# EAGLE board PCB (EAGLE 9.7.0)
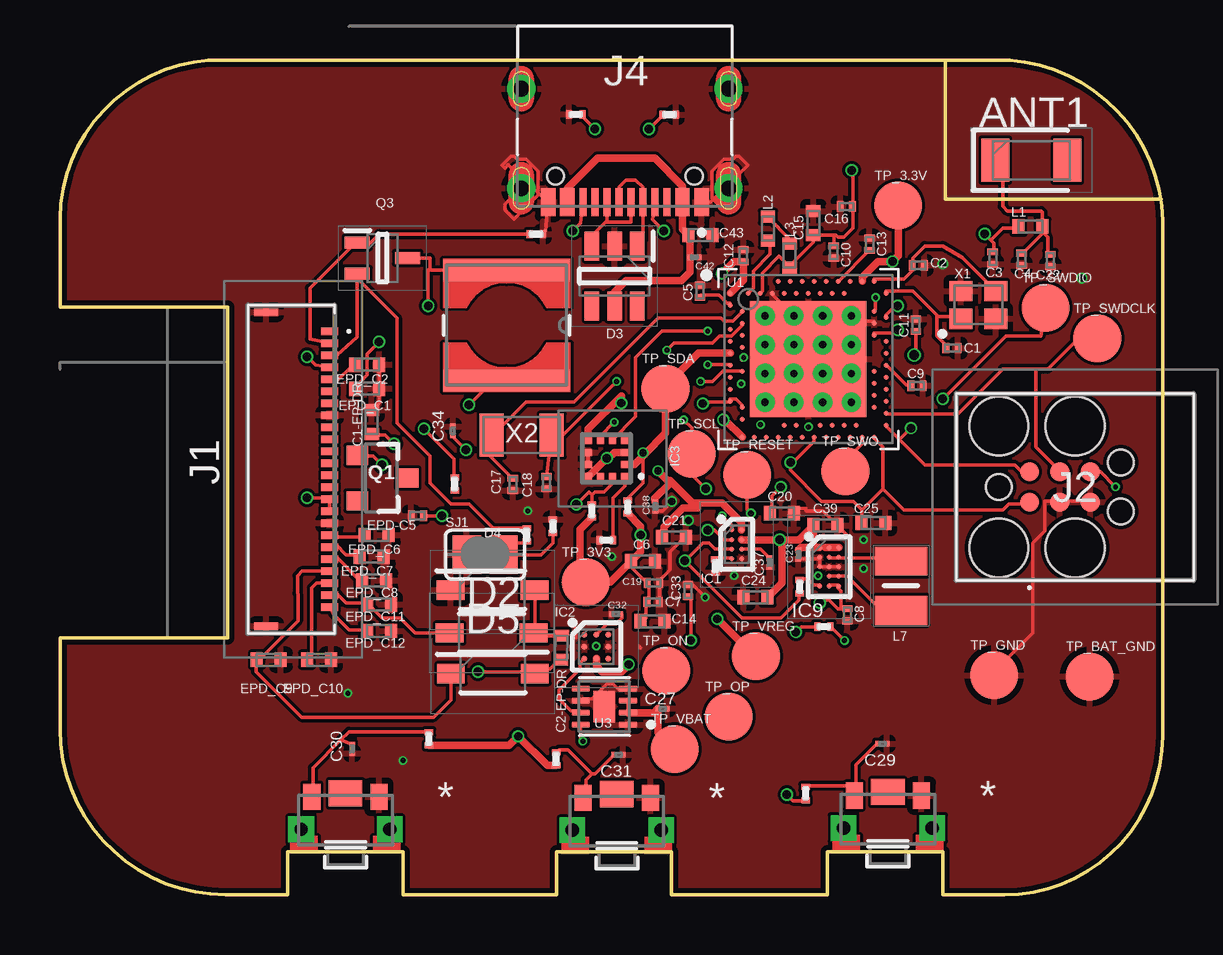
[diagram p0: board, top side]
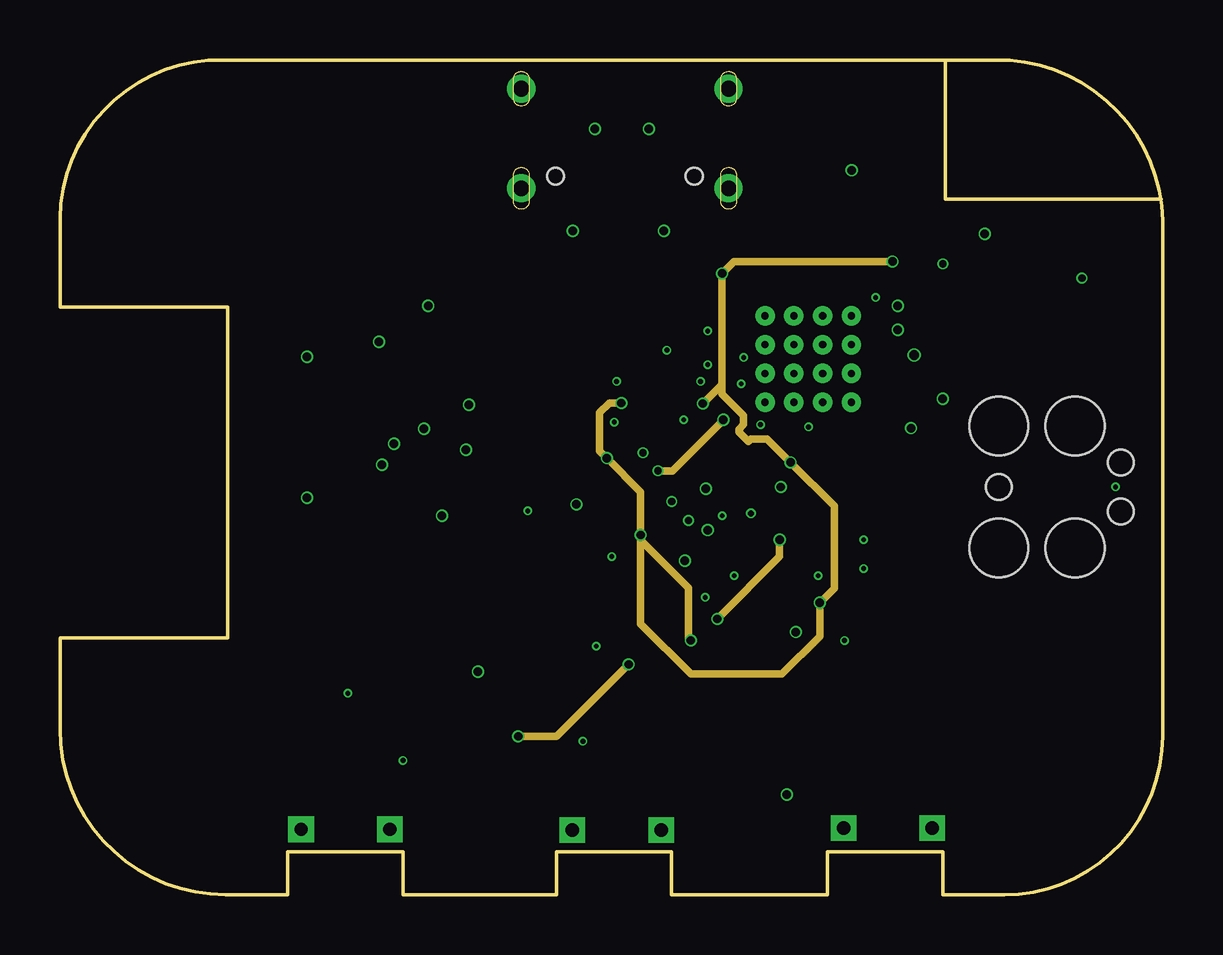
[diagram p1: board, inner layer Route15]
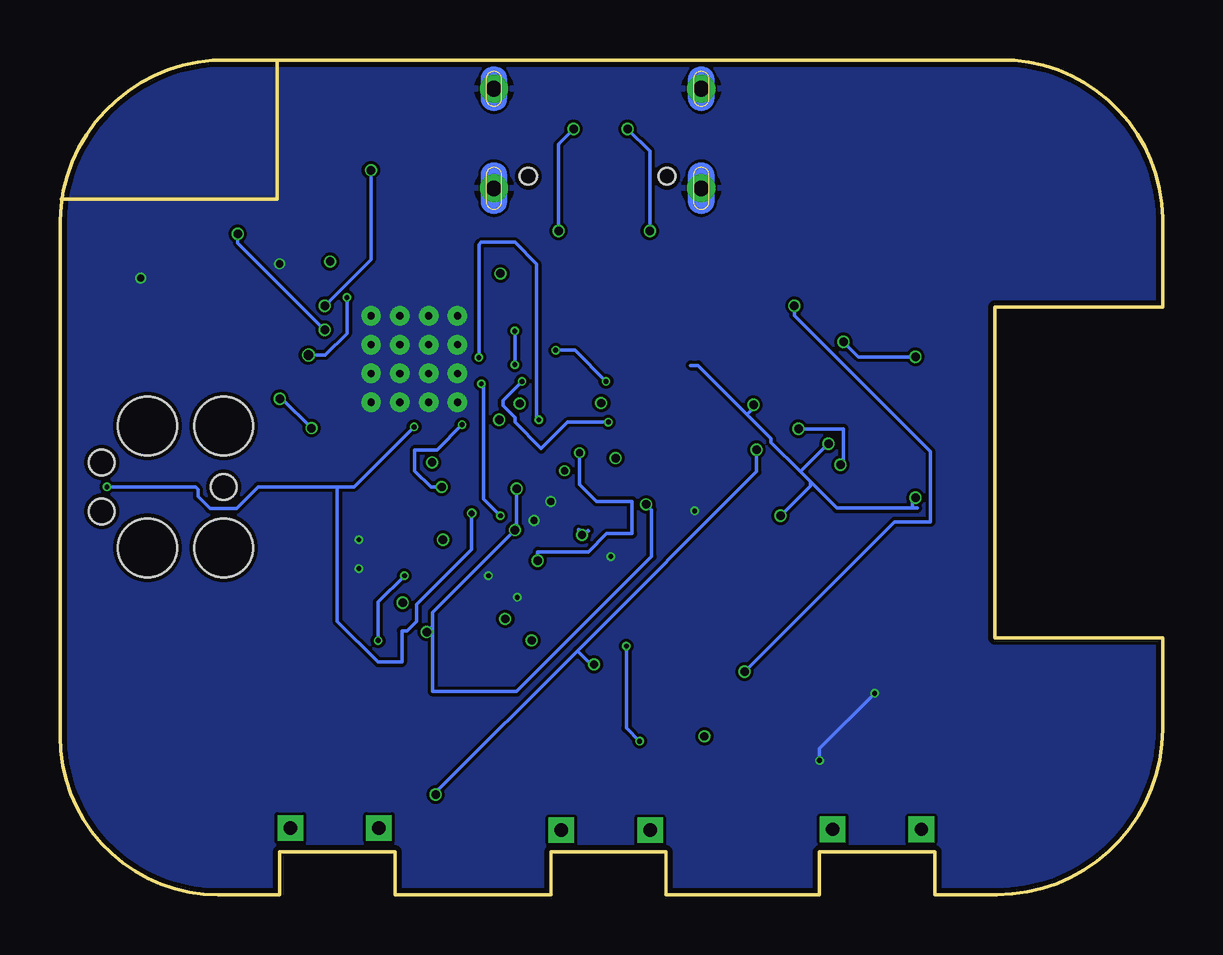
[diagram p2: board, bottom side, seen from below]

Size 45.96 x 34.8 mm. Coordinates in mm from the lower left corner, seen from the top.
Outline: 0,10.7 0,6.9 arc90 6.9,0 9.5,0 9.5,1.8 14.3,1.8 14.3,0 20.7,0 20.7,1.8 25.5,1.8 25.5,0 32,0 32,1.8 36.8,1.8 36.8,0 39.36,0 arc90 45.96,6.6 45.96,28.1 arc90 38.96,34.8 6.8,34.8 arc90 0,28.2 0,24.5 7,24.5 7,10.7 0,10.7
Copper layers (1+2*15+16): Top 0.035mm / dielectric 1.6mm / Route2 0.035mm / dielectric 0.15mm / Route15 0.035mm / dielectric 0.2mm / Bottom 0.035mm
Design rules "jlcpcb-2layers.dru *": minimum track width 5mil, minimum drill 0.3mm, track to track 5mil, track to pad 5mil, pad to pad 5mil, via to via 5mil, smd to smd 5mil, copper to edge 0.2mm, drill to drill 6mil, minimum pad ring 10mil, minimum via ring 3mil, stop-mask expansion 4mil, vias tented up to drill 0mil, thermal gap 10mil
Milling: 2 lines

## Footprints (pad centres in the part's own frame; a part is rotated, then mirrored left to right if it is on the bottom)
2450AT18B100E_ANTC3216X140N = smd 1.15 x 1.8: 1 -1.5,0; 2 1.5,0
NORDIC_NRF_3_RESC0201_L = smd 0.28 x 0.43: 1 -0.255,0; 2 0.255,0
NORDIC_NRF_3_RESC0402_L = smd 0.5 x 0.6: 1 -0.5,0; 2 0.5,0
GRM011R60J152KE01L_2_CAPC0201X13N = smd 0.22 x 0.23: 1 -0.185,0; 2 0.185,0
ESP32_C6_LIBRARY_5_SOD3716X135N = smd 1.15 x 0.8: 1 -1.75,0; 2 1.75,0
ESP32_C6_LIBRARY_3_SOT95P280X145-6N = smd 1.2 x 0.6: 1 -1.25,0.95; 2 -1.25,0; 3 -1.25,-0.95; 4 1.25,-0.95; 5 1.25,0; 6 1.25,0.95
BQ25180YBGR_BGA8C40P2X4_100X155X50 = smd 0.2 x 0.2: A1 -0.2,0.6; A2 0.2,0.6; B1 -0.2,0.2; B2 0.2,0.2; C1 -0.2,-0.2; C2 0.2,-0.2; D1 -0.2,-0.6; D2 0.2,-0.6
DRV2605YZFR_BGA9C50P3X3_144X144X62 = smd 0.25 x 0.25: A1 -0.5,0.5; A2 0,0.5; A3 0.5,0.5; B1 -0.5,0; B2 0,0; B3 0.5,0; C1 -0.5,-0.5; C2 0,-0.5; C3 0.5,-0.5
BMA423_BMA423 = smd 0.3 x 0.35: 1 -0.75,-0.775; 2 -0.25,-0.775; 3 0.25,-0.775; 4 0.75,-0.775; 7 0.75,0.775; 8 0.25,0.775; 9 -0.25,0.775; 10 -0.75,0.775 | smd 0.35 x 0.3: 5 0.775,-0.25; 6 0.775,0.25; 11 -0.775,0.25; 12 -0.775,-0.25
RT6160AWSC_BGA15C40P3X5_140X230X60 = smd 0.216 x 0.216: A1 -0.4,0.8; A2 0,0.8; A3 0.4,0.8; B1 -0.4,0.4; B2 0,0.4; B3 0.4,0.4; C1 -0.4,0; C2 0,0; C3 0.4,0; D1 -0.4,-0.4; D2 0,-0.4; D3 0.4,-0.4; E1 -0.4,-0.8; E2 0,-0.8; E3 0.4,-0.8
503480-2400_5034802400 = smd 0.3 x 0.7: 1 -5.75,1.525; 2 -5.25,1.525; 3 -4.75,1.525; 4 -4.25,1.525; 5 -3.75,1.525; 6 -3.25,1.525; 7 -2.75,1.525; 8 -2.25,1.525; 9 -1.75,1.525; 10 -1.25,1.525; 11 -0.75,1.525; 12 -0.25,1.525; 13 0.25,1.525; 14 0.75,1.525; 15 1.25,1.525; 16 1.75,1.525; 17 2.25,1.525; 18 2.75,1.525; 19 3.25,1.525; 20 3.75,1.525; 21 4.25,1.525; 22 4.75,1.525; 23 5.25,1.525; 24 5.75,1.525 | smd 0.3 x 1: MP1 -6.54,-1.125; MP2 6.54,-1.125
TC2030-IDC_TC2030IDC = smd 0.783 x 0.783: 1 -0.953,-0.635; 2 -0.953,0.635; 3 0.317,-0.635; 4 0.317,0.635; 5 1.588,-0.635; 6 1.588,0.635 | hole 2.451: -2.223,-2.54; -2.223,2.54; 0.952,-2.54; 0.952,2.54 | hole 1.067: -2.223,0; 2.857,-1.016; 2.857,1.016
KH-TYPE-C-16P_KINGHELM_KH-TYPE-C-16P = smd 0.6 x 1.15: A1_B12 -3.2,4.725; A4_B9 -2.4,4.725; A9_B4 2.4,4.725; A12_B1 3.2,4.725 | smd 0.3 x 1.15: A5 -1.25,4.725; A6 -0.25,4.725; A7 0.25,4.725; A8 1.25,4.725; B5 1.75,4.725; B6 0.75,4.725; B7 -0.75,4.725; B8 -1.75,4.725 | drill 0.65 pad 1.05: SH1 -4.32,0; SH2 4.32,0; SH3 -4.32,4.15; SH4 4.32,4.15 | hole 0.7: -2.89,3.65; 2.89,3.65
NORDIC_NRF_2_RESC0402_L = smd 0.5 x 0.6: 1 -0.5,0; 2 0.5,0
ESP32_C6_LIBRARY_2_IND_4828-WE-TPC_WRE = smd 0.9 x 5.3: 1 -2.286,0; 2 2.286,0
MLP2016SR47MT0S1_INDC2016X100N = smd 1.2 x 2.2: 1 -1.028,0; 2 1.028,0
ESP32_C6_LIBRARY_4_ESP32_C6_LIBRARY_4_ESP32_C6_LIBRARY_4_ESP32_C6_LIBRARY_4_ESP32_WROVER_SPARKFUN-DISCRETESEMI_SOT23-3 = smd 0.8 x 0.9: 1 -0.95,-1; 2 0.95,-1; 3 0,1.1
ESP32_C6_LIBRARY_6_SOT65P210X110-3N = smd 1.05 x 0.5: 1 -1.05,0.65; 2 -1.05,-0.65; 3 1.05,0
ERA-1AEB3401C_0201 = smd 0.35 x 0.25: 1 0,0.275; 2 0,-0.275
CPF0201D7K68C1_0201 = smd 0.35 x 0.25: 1 0,0.275; 2 0,-0.275
ESP32_C6_LIBRARY_7_JUMPER_SJ = smd 1.168 x 1.6: 1 -0.762,0; 2 0.762,0
2025-10-22_07-23-44_LIBRARY_SW_EVP-AKE31A_PAN = smd 0.711 x 1.092: 1 -1.4,-0.972; 2 1.4,-0.972 | drill 0.559 pad 0.914 square: 3 -1.848,0.381; 4 1.848,0.381 | smd 1.397 x 1.092: 5 0,-1.124
HECTOR_WATCH_1_TP20R = smd 2 x 2: TP 0,0
NORDIC_NRF_4_AQFN50P700X700X85_HS-74N = smd 4.85 x 4.85: P$74 0,0 | drill 0.3 pad 0.6: P$75 -1.8,1.8; P$76 -0.6,1.8; P$77 0.6,1.8; P$78 1.8,1.8; P$79 -1.8,0.6; P$80 -0.6,0.6; P$81 0.6,0.6; P$82 1.8,0.6; P$83 -1.8,-0.6; P$84 -0.6,-0.6; P$85 0.6,-0.6; P$86 1.8,-0.6; P$87 -1.8,-1.8; P$88 -0.6,-1.8; P$89 0.6,-1.8; P$90 1.8,-1.8 | smd 0.2 x 0.2: P$A8 -1.25,3.25; P$A10 -0.75,3.25; P$A12 -0.25,3.25; P$A14 0.25,3.25; P$A16 0.75,3.25; P$A18 1.25,3.25; P$A20 1.75,3.25; P$A22 2.25,3.25; P$A23 2.75,3.25; P$AA24 3.25,-2.25; P$AB2 -2.75,-2.5; P$AC5 -2,-2.75; P$AC9 -1,-2.75; P$AC11 -0.5,-2.75; P$AC13 0,-2.75; P$AC15 0.5,-2.75; P$AC17 1,-2.75; P$AC19 1.5,-2.75; P$AC21 2,-2.75; P$AC24 3.25,-2.75; P$AD2 -2.75,-3.25; P$AD4 -2.25,-3.25; P$AD6 -1.75,-3.25; P$AD8 -1.25,-3.25; P$AD10 -0.75,-3.25; P$AD12 -0.25,-3.25; P$AD14 0.25,-3.25; P$AD16 0.75,-3.25; P$AD18 1.25,-3.25; P$AD20 1.75,-3.25; P$AD22 2.25,-3.25; P$AD23 2.75,-3.25; P$B1 -3.25,2.75; P$B3 -2.5,2.75; P$B5 -2,2.75; P$B7 -1.5,2.75; P$B9 -1,2.75; P$B11 -0.5,2.75; P$B13 0,2.75; P$B15 0.5,2.75; P$B17 1,2.75; P$B19 1.5,2.75; P$B24 3.25,2.75; P$C1 -3.25,2.25; P$D2 -2.75,2; P$D23 2.75,2; P$E24 3.25,1.75; P$F2 -2.75,1.5; P$F23 2.75,1.5; P$G1 -3.25,1.25; P$H2 -2.75,1; P$H23 2.75,1; P$J1 -3.25,0.75; P$J24 3.25,0.75; P$K2 -2.75,0.5; P$L1 -3.25,0.25; P$L24 3.25,0.25; P$M2 -2.75,0; P$N1 -3.25,-0.25; P$N24 3.25,-0.25; P$P2 -2.75,-0.5; P$P23 2.75,-0.5; P$R1 -3.25,-0.75; P$R24 3.25,-0.75; P$T2 -2.75,-1; P$T23 2.75,-1; P$U1 -3.25,-1.25; P$U24 3.25,-1.25; P$V23 2.75,-1.5; P$W1 -3.25,-1.75; P$W24 3.25,-1.75; P$Y2 -2.75,-2; P$Y23 2.75,-2
ESP32_C6_LIBRARY_SON50P200X200X80-9N = smd 0.76 x 0.27: 1 -0.985,0.75; 2 -0.985,0.25; 3 -0.985,-0.25; 4 -0.985,-0.75; 5 0.985,-0.75; 6 0.985,-0.25; 7 0.985,0.25; 8 0.985,0.75 | smd 0.9 x 1.3: 9 0,0
NORDIC_NRF_BT-XTAL_2016_N = smd 0.95 x 0.85: 1 -0.725,-0.575; 2 0.725,-0.575; 3 0.725,0.575; 4 -0.725,0.575
NORDIC_NRF_1_XTAL_3215_N = smd 1 x 1.8: 1 -1.25,0; 2 1.25,0

## Placement (x,y rotation side)
ANT1  2450AT18B100E  [2450AT18B100E_ANTC3216X140N]  40.49,30.62 0 top
C1  12pF  [NORDIC_NRF_3_RESC0201_L]  37.18,22.79 0 top
C1-EP-DR  10uF  [NORDIC_NRF_3_RESC0402_L]  13,19.7 90 top
C2  12pF  [NORDIC_NRF_3_RESC0201_L]  35.78,26.24 0 top
C2-EP-DR  4.7uF/25V  [NORDIC_NRF_3_RESC0402_L]  20.9,10.3 269 top
C3  1pF  [NORDIC_NRF_3_RESC0201_L]  38.88,26.54 270 top
C4  1pF  [NORDIC_NRF_3_RESC0201_L]  40.08,26.49 270 top
C5  100nF  [NORDIC_NRF_3_RESC0201_L]  26.68,25.16 90 top
C6  4.7µF  [NORDIC_NRF_3_RESC0402_L]  24.3,13.9 0 top
C7  100nF  [NORDIC_NRF_3_RESC0201_L]  24.72,12.21 0 top
C8  100nF  [NORDIC_NRF_3_RESC0201_L]  32.82,11.67 270 top
C9  820pF  [NORDIC_NRF_3_RESC0201_L]  35.72,21.22 0 top
C10  N.C.  [NORDIC_NRF_3_RESC0201_L]  32.25,26.79 270 top
C11  100pF  [NORDIC_NRF_3_RESC0201_L]  35.68,23.74 90 top
C12  100nF  [NORDIC_NRF_3_RESC0201_L]  28.48,26.64 90 top
C13  N.C.  [NORDIC_NRF_3_RESC0201_L]  33.75,27.12 90 top
C14  4.7uF  [NORDIC_NRF_3_RESC0402_L]  24.7,11.4 0 top
C15  1.0uF  [NORDIC_NRF_3_RESC0402_L]  31.4,28 90 top
C16  47nF  [NORDIC_NRF_3_RESC0201_L]  32.78,28.69 180 top
C17  12pF  [NORDIC_NRF_3_RESC0201_L]  18.88,17.11 90 top
C18  12pF  [NORDIC_NRF_3_RESC0201_L]  20.28,17.18 90 top
C19  22uF  [NORDIC_NRF_3_RESC0201_L]  24.74,13 0 top
C20  4.7µF  [NORDIC_NRF_3_RESC0402_L]  30.1,15.9 0 top
C21  4.7µF  [NORDIC_NRF_3_RESC0402_L]  25.6,14.9 0 top
C22  N.C.  [NORDIC_NRF_3_RESC0201_L]  41.28,26.44 270 top
C23  0.1uF  [GRM011R60J152KE01L_2_CAPC0201X13N]  30.78,14.18 90 top
C24  10uF  [NORDIC_NRF_3_RESC0402_L]  29,12.4 0 top
C25  22uF  [NORDIC_NRF_3_RESC0402_L]  33.9,15.5 0 top
C27  0.1uF  [GRM011R60J152KE01L_2_CAPC0201X13N]  25.12,7.76 180 top
C29  1uF  [GRM011R60J152KE01L_2_CAPC0201X13N]  34.28,6.3 180 top
C30  1uF  [GRM011R60J152KE01L_2_CAPC0201X13N]  12.18,6.08 90 top
C31  1uF  [GRM011R60J152KE01L_2_CAPC0201X13N]  23.28,5.84 180 top
C32  1uF  [GRM011R60J152KE01L_2_CAPC0201X13N]  23.18,11.7 0 top
C33  22uF  [NORDIC_NRF_3_RESC0201_L]  26.18,12.68 90 top
C34  0.1uF  [GRM011R60J152KE01L_2_CAPC0201X13N]  16.38,19.34 270 top
C37  1uF  [GRM011R60J152KE01L_2_CAPC0201X13N]  29.57,13.85 90 top
C38  1uF  [GRM011R60J152KE01L_2_CAPC0201X13N]  24.81,16.19 90 top
C39  10uF  [NORDIC_NRF_3_RESC0402_L]  31.9,15.4 0 top
C42  0.1uF  [GRM011R60J152KE01L_2_CAPC0201X13N]  26.44,26.58 180 top
C43  4.7uF  [NORDIC_NRF_3_RESC0402_L]  26.7,27.5 0 top
D2  MBR0530  [ESP32_C6_LIBRARY_5_SOD3716X135N]  17.99,10.91 180 top
D3  USBLC6-2SC6Y  [ESP32_C6_LIBRARY_3_SOT95P280X145-6N]  23.12,25.79 270 top
D4  MBR0530  [ESP32_C6_LIBRARY_5_SOD3716X135N]  18.03,12.7 0 top
D5  MBR0530  [ESP32_C6_LIBRARY_5_SOD3716X135N]  18.05,9.22 0 top
EPD-C5  0.1uF/50V  [NORDIC_NRF_3_RESC0201_L]  14.9,15.8 0 top
EPD_C1  1uF/50V  [NORDIC_NRF_3_RESC0402_L]  12.8,21.1 180 top
EPD_C2  1uF/50V  [NORDIC_NRF_3_RESC0402_L]  12.8,22.1 180 top
EPD_C6  1uF/50V  [NORDIC_NRF_3_RESC0402_L]  13.2,15 180 top
EPD_C7  1uF/50V  [NORDIC_NRF_3_RESC0402_L]  13,14.1 180 top
EPD_C8  1uF/50V  [NORDIC_NRF_3_RESC0402_L]  13.1,13.1 180 top
EPD_C9  1uF/50V  [NORDIC_NRF_3_RESC0402_L]  8.7,9.8 180 top
EPD_C10  1uF/50V  [NORDIC_NRF_3_RESC0402_L]  10.8,9.8 180 top
EPD_C11  1uF/50V  [NORDIC_NRF_3_RESC0402_L]  13.3,12.1 180 top
EPD_C12  1uF/50V  [NORDIC_NRF_3_RESC0402_L]  13.3,11 180 top
IC1  BQ25180YBGR_BQ25180YBGR  [BQ25180YBGR_BGA8C40P2X4_100X155X50]  28.21,14.61 0 top
IC2  DRV2605YZFR  [DRV2605YZFR_BGA9C50P3X3_144X144X62]  22.36,10.35 0 top
IC3  BMA421  [BMA423_BMA423]  22.78,18.19 90 top
IC9  RT6160AWSC  [RT6160AWSC_BGA15C40P3X5_140X230X60]  32.06,13.67 0 top
J1  503480-2400  [503480-2400_5034802400]  9.72,17.74 270 top
J2  TC2030-IDC  [TC2030-IDC_TC2030IDC]  41.36,17 0 top
J4  KH-TYPE-C-16P  [KH-TYPE-C-16P_KINGHELM_KH-TYPE-C-16P]  23.55,33.6 180 top
L1  3.9nH  [NORDIC_NRF_2_RESC0402_L]  40.45,27.86 0 top
L2  10µH  [NORDIC_NRF_2_RESC0402_L]  29.51,27.76 90 top
L3  15nH  [NORDIC_NRF_2_RESC0402_L]  30.41,26.64 270 top
L5  68uH  [ESP32_C6_LIBRARY_2_IND_4828-WE-TPC_WRE]  18.62,23.74 270 top
L7  FTC252012SR47MBCA  [MLP2016SR47MT0S1_INDC2016X100N]  35.06,12.88 270 top
Q1  20V/4.2A/52mΩ/1.4W  [ESP32_C6_LIBRARY_4_ESP32_C6_LIBRARY_4_ESP32_C6_LIBRARY_4_ESP32_C6_LIBRARY_4_ESP32_WROVER_SPARKFUN-DISCRETESEMI_SOT23-3]  13.39,17.37 270 top
Q3  SI1308EDL-T1-GE3  [ESP32_C6_LIBRARY_6_SOT65P210X110-3N]  13.44,26.54 0 top
R1  10K  [ERA-1AEB3401C_0201]  27.32,13.7 181 top
R1_EP_DR  0.47  [CPF0201D7K68C1_0201]  19.45,15 180 top
R1_USB  5K1  [CPF0201D7K68C1_0201]  25.4,32.52 270 top
R2  0  [CPF0201D7K68C1_0201]  30.84,12.84 180 top
R2_EP_DR  10K  [CPF0201D7K68C1_0201]  19.85,27.54 270 top
R2_USB  5K1  [CPF0201D7K68C1_0201]  21.5,32.53 270 top
R3  0  [CPF0201D7K68C1_0201]  22.77,14.78 90 top
R4  0  [CPF0201D7K68C1_0201]  31.84,11.18 90 top
R5  10K  [CPF0201D7K68C1_0201]  15.38,6.5 0 top
R7  10K  [CPF0201D7K68C1_0201]  31.08,4.22 0 top
R8  10K  [CPF0201D7K68C1_0201]  20.68,5.66 0 top
R17  3K3  [CPF0201D7K68C1_0201]  22.17,16 180 top
R18  3K3  [CPF0201D7K68C1_0201]  23.67,16.16 180 top
R_POWER_EPD  10K  [CPF0201D7K68C1_0201]  16.45,17.12 0 top
R_TYPE_SEL  2.2  [CPF0201D7K68C1_0201]  20.55,15.36 0 top
SJ1  [ESP32_C6_LIBRARY_7_JUMPER_SJ]  17.72,14.18 0 top
SW_DN  2025-10-22_07-23-44_LIBRARY_EVP-AKE31ASW_EVP-AKE31A_PAN  [2025-10-22_07-23-44_LIBRARY_SW_EVP-AKE31A_PAN]  34.51,3.16 180 top
SW_ENT  2025-10-22_07-23-44_LIBRARY_EVP-AKE31ASW_EVP-AKE31A_PAN  [2025-10-22_07-23-44_LIBRARY_SW_EVP-AKE31A_PAN]  23.21,3.07 180 top
SW_UP  2025-10-22_07-23-44_LIBRARY_EVP-AKE31ASW_EVP-AKE31A_PAN  [2025-10-22_07-23-44_LIBRARY_SW_EVP-AKE31A_PAN]  11.9,3.11 180 top
TP_3.3V  HECTOR_WATCH_1_TPTP20R  [HECTOR_WATCH_1_TP20R]  34.94,28.73 0 top
TP_3V3  HECTOR_WATCH_1_TPTP20R  [HECTOR_WATCH_1_TP20R]  21.91,13.03 0 top
TP_BAT_GND  HECTOR_WATCH_1_TPTP20R  [HECTOR_WATCH_1_TP20R]  42.92,9.1 0 top
TP_GND  HECTOR_WATCH_1_TPTP20R  [HECTOR_WATCH_1_TP20R]  38.94,9.15 0 top
TP_ON  HECTOR_WATCH_1_TPTP20R  [HECTOR_WATCH_1_TP20R]  25.28,9.34 0 top
TP_OP  HECTOR_WATCH_1_TPTP20R  [HECTOR_WATCH_1_TP20R]  27.88,7.42 0 top
TP_RESET  HECTOR_WATCH_1_TPTP20R  [HECTOR_WATCH_1_TP20R]  28.64,17.51 0 top
TP_SCL  HECTOR_WATCH_1_TPTP20R  [HECTOR_WATCH_1_TP20R]  26.34,18.38 0 top
TP_SDA  HECTOR_WATCH_1_TPTP20R  [HECTOR_WATCH_1_TP20R]  25.24,21.1 0 top
TP_SWDCLK  HECTOR_WATCH_1_TPTP20R  [HECTOR_WATCH_1_TP20R]  43.24,23.19 0 top
TP_SWDIO  HECTOR_WATCH_1_TPTP20R  [HECTOR_WATCH_1_TP20R]  41.09,24.47 0 top
TP_SWO  HECTOR_WATCH_1_TPTP20R  [HECTOR_WATCH_1_TP20R]  32.74,17.65 0 top
TP_VBAT  HECTOR_WATCH_1_TPTP20R  [HECTOR_WATCH_1_TP20R]  25.62,6.08 0 top
TP_VREG  HECTOR_WATCH_1_TPTP20R  [HECTOR_WATCH_1_TP20R]  29.01,9.94 0 top
U1  NRF52840_QF  [NORDIC_NRF_4_AQFN50P700X700X85_HS-74N]  31.19,22.33 0 top
U3  MAX17048G+T10  [ESP32_C6_LIBRARY_SON50P200X200X80-9N]  22.69,7.84 180 top
X1  32MHz  [NORDIC_NRF_BT-XTAL_2016_N]  38.28,24.59 0 top
X2  32.768kHz  [NORDIC_NRF_1_XTAL_3215_N]  19.25,19.16 0 top

## Library data of the parts
ANT1 = InkTime_v5.lbr; ARROW_PART_NUMBER: 2450AT18B100E; ARROW_PRICE-STOCK: https://www.arrow.com/en/products/2450at18b100e/johanson-dielectrics?utm_currency=USD&region=nac; DESCRIPTION: Antennas 2.45GHz ANTENNA; HEIGHT: 1.4mm; MANUFACTURER_NAME: JOHANSON TECHNOLOGY; MANUFACTURER_PART_NUMBER: 2450AT18B100E; MOUSER_PART_NUMBER: 609-2450AT18B100E; MOUSER_PRICE-STOCK: https://www.mouser.co.uk/ProductDetail/Johanson-Technology/2450AT18B100E?qs=yCnrNFeXz%252Bh5MFsFIXGZGA%3D%3D
C1 C1-EP-DR C2 C2-EP-DR C3-C22 C24 C25 C33 C39 C43 EPD-C5 EPD_C1 EPD_C2 EPD_C6-EPD_C12 L1-L3 R1 R1_EP_DR R1_USB R2 R2_EP_DR R2_USB R3-R5 R7 R8 R17 R18 R_POWER_EPD R_TYPE_SEL SJ1 TP_3.3V TP_3V3 TP_BAT_GND TP_GND TP_ON TP_OP TP_RESET TP_SCL TP_SDA TP_SWDCLK TP_SWDIO TP_SWO TP_VBAT TP_VREG U1 X1 X2 = InkTime_v5.lbr
C23 C27 C29-C32 C34 C37 C38 C42 = InkTime_v5; AVAILABILITY: In Stock; CHECK_PRICES: https://www.snapeda.com/parts/GRM011R60J152KE01L/Murata/view-part/?ref=eda; DESCRIPTION: SMD Capacitor X5R(EIA) with Capacitance: 1500pF Tol. 10%. Rated Voltage: 6.3Vdc; MF: Murata; MP: GRM011R60J152KE01L; PACKAGE: 0201 Murata; PRICE: None; SNAPEDA_LINK: https://www.snapeda.com/parts/GRM011R60J152KE01L/Murata/view-part/?ref=snap
D2 D4 D5 = InkTime_v5.lbr; AVAILABILITY: In Stock; CHECK_PRICES: https://www.snapeda.com/parts/MBR0530/Onsemi/view-part/?ref=eda; DESCRIPTION: Diode Schottky 30 V 500mA Surface Mount SOD-123; MF: ON Semiconductor; MP: MBR0530; PACKAGE: SOD-123-2 ON Semiconductor; PRICE: None; PURCHASE-URL: https://www.snapeda.com/api/url_track_click_mouser/?unipart_id=179458&manufacturer=ON Semiconductor&part_name=MBR0530&search_term=None; SNAPEDA_LINK: https://www.snapeda.com/parts/MBR0530/Onsemi/view-part/?ref=snap
D3 = InkTime_v5.lbr; AVAILABILITY: In Stock; CHECK_PRICES: https://www.snapeda.com/parts/USBLC6-2SC6Y/STMicroelectronics/view-part/?ref=eda; DESCRIPTION: 17V Clamp 5A (8/20µs) Ipp Tvs Diode Surface Mount SOT-23-6; MF: STMicroelectronics; MP: USBLC6-2SC6Y; PACKAGE: SOT-23-6 STMicroelectronics; PRICE: None; SNAPEDA_LINK: https://www.snapeda.com/parts/USBLC6-2SC6Y/STMicroelectronics/view-part/?ref=snap
IC1 = InkTime_v5; ARROW_PART_NUMBER: BQ25180YBGR; ARROW_PRICE-STOCK: https://www.arrow.com/en/products/bq25180ybgr/texas-instruments?utm_currency=USD&region=nac; DESCRIPTION: Charger IC Lithium Ion/Polymer, Lithium Iron Phosphate 8-DSBGA (1.6x1.1); HEIGHT: 0.5mm; MANUFACTURER_NAME: Texas Instruments; MANUFACTURER_PART_NUMBER: BQ25180YBGR; MOUSER_PART_NUMBER: 595-BQ25180YBGR; MOUSER_PRICE-STOCK: https://www.mouser.co.uk/ProductDetail/Texas-Instruments/BQ25180YBGR?qs=doiCPypUmgEWjAK%252BJAX6Tw%3D%3D
IC2 = InkTime_v5.lbr; ARROW_PART_NUMBER: DRV2605YZFR; ARROW_PRICE-STOCK: https://www.arrow.com/en/products/drv2605yzfr/texas-instruments?region=nac; DESCRIPTION: Haptic Driver for ERM/LRA with Built-In Library and Smart Loop Architecture; HEIGHT: 0.625mm; MANUFACTURER_NAME: Texas Instruments; MANUFACTURER_PART_NUMBER: DRV2605YZFR
IC3 = InkTime_v5.lbr; ARROW_PART_NUMBER: BMA423; ARROW_PRICE-STOCK: https://www.arrow.com/en/products/bma423/bosch; DESCRIPTION: Accelerometers Triaxial low-g 12bit Acceleration Sensor; HEIGHT: 1mm; MANUFACTURER_NAME: BOSCH; MANUFACTURER_PART_NUMBER: BMA423; MOUSER_PART_NUMBER: 262-BMA423; MOUSER_PRICE-STOCK: https://www.mouser.co.uk/ProductDetail/Bosch-Sensortec/BMA423?qs=HXFqYaX1Q2xC%252BSgeGoX3mg%3D%3D
IC9 = InkTime_v5; DESCRIPTION: Buck-Boost Regulator Positive Output Step-Up/Step-Down I2C DC-DC Controller IC 15-WL-CSP (BSC) (1.4x2.3); HEIGHT: 0.6mm; MANUFACTURER_NAME: RICHTEK; MANUFACTURER_PART_NUMBER: RT6160AWSC; MOUSER_PART_NUMBER: 835-RT6160AWSC; MOUSER_PRICE-STOCK: https://www.mouser.co.uk/ProductDetail/Richtek/RT6160AWSC?qs=amGC7iS6iy%2FLd9PSoixZXQ%3D%3D
J1 = InkTime_v5.lbr; DESCRIPTION: FFC & FPC Connectors 0.5mm FPC RA SMT Dual Contact 24Ckt; HEIGHT: 1.87mm; MANUFACTURER_NAME: Molex; MANUFACTURER_PART_NUMBER: 503480-2400; MOUSER_PART_NUMBER: 538-503480-2400; MOUSER_PRICE-STOCK: https://www.mouser.co.uk/ProductDetail/Molex/503480-2400?qs=OAhjpuo3Vu7efIoxFh9AOw%3D%3D
J2 = InkTime_v5.lbr; DESCRIPTION: CABLE ADAPTER 6 POS; HEIGHT: 19mm; MANUFACTURER_NAME: Tag Connect; MANUFACTURER_PART_NUMBER: TC2030-IDC
J4 = InkTime_v5.lbr; AVAILABILITY: Not in stock; CHECK_PRICES: https://www.snapeda.com/parts/KH-TYPE-C-16P/Kinghelm/view-part/?ref=eda; MF: kinghelm; MP: KH-TYPE-C-16P; PACKAGE: None; PRICE: None; SNAPEDA_LINK: https://www.snapeda.com/parts/KH-TYPE-C-16P/Kinghelm/view-part/?ref=snap
L5 = InkTime_v5.lbr; COPYRIGHT: Copyright (C) 2024 Ultra Librarian. All rights reserved.; MANUFACTURER_PART_NUMBER: 744043680; MFR_NAME: Wurth Electronics
L7 = InkTime_v5.lbr; DESCRIPTION: SMD / SMT Inductors (Coils), L=0.47?H, L x W x T :; HEIGHT: 1mm; JLCPCB: https://jlcpcb.com/partdetail/6763488-FTC252012SR47MBCA/C5832368; MANUFACTURER_NAME: TDK; MANUFACTURER_PART_NUMBER: FTC252012SR47MBCA
Q1 = InkTime_v5.lbr; PROD_ID: TRAN-14388
Q3 = InkTime_v5.lbr; AVAILABILITY: In Stock; CHECK_PRICES: https://www.snapeda.com/parts/SI1308EDL-T1-GE3/Vishay+Siliconix/view-part/?ref=eda; DESCRIPTION: Si1308EDL-T1-GE3 N-channel MOSFET Transistor, 1.5 A, 30 V, 3-Pin SC-70 | Siliconix / Vishay SI1308EDL-T1-GE3; MF: Vishay Siliconix; MP: SI1308EDL-T1-GE3; PACKAGE: SOT-323 Vishay Semiconductor; PRICE: None; PURCHASE-URL: https://www.snapeda.com/api/url_track_click_mouser/?unipart_id=274603&manufacturer=Vishay Siliconix&part_name=SI1308EDL-T1-GE3&search_term=None; SNAPEDA_LINK: https://www.snapeda.com/parts/SI1308EDL-T1-GE3/Vishay+Siliconix/view-part/?ref=snap
SW_DN SW_ENT SW_UP = InkTime_v5.lbr; COPYRIGHT: Copyright (C) 2025 Ultra Librarian. All rights reserved.; DIGI-KEY_PART_NUMBER_1: P123437TR-ND; DIGI-KEY_PART_NUMBER_2: P123437CT-ND; DIGI-KEY_PART_NUMBER_3: P123437DKR-ND; MANUFACTURER_NAME: Panasonic; MANUFACTURER_PART_NUMBER: EVP-AKE31A
U3 = InkTime_v5.lbr; AVAILABILITY: In Stock; CHECK_PRICES: https://www.snapeda.com/parts/MAX17048G+T10/Analog+Devices/view-part/?ref=eda; DESCRIPTION: 3µA 1-Cell/2-Cell Fuel Gauge with ModelGauge; MF: Analog Devices; MP: MAX17048G+T10; PACKAGE: TDFN-8 Maxim; PRICE: None; PURCHASE-URL: https://www.snapeda.com/api/url_track_click_mouser/?unipart_id=329239&manufacturer=Analog Devices&part_name=MAX17048G+T10&search_term=None; SNAPEDA_LINK: https://www.snapeda.com/parts/MAX17048G+T10/Analog+Devices/view-part/?ref=snap

## Nets
3V3/1.7D: C34.2 IC2.C2 R5.2 R7.2 R8.2
3V3/2.4A: C6.1 C7.1 C8.1 C12.1 C14.1 C19.1 C25.1 C33.1 IC3.3 IC3.7 IC3.10 IC9.E2 IC9.E3 J2.1 R17.1 R18.1 TP_3.3V.TP TP_3V3.TP U1.P$A22 U1.P$AD14 U1.P$AD23 U1.P$B1 U1.P$W1 U1.P$Y2
10K: IC1.D1 R1.2
ALERT/1.6C: U3.5
ALERT/2.5C: U1.P$J24
D+/1.5D: D3.4
D+/2.7D: U1.P$AD6
D-/1.5D: D3.6
D-/2.7D: U1.P$AD4
DN: D3.1 J4.A7 J4.B7
DP: D3.3 J4.A6 J4.B6
EPD_3V3: C1-EP-DR.1 EPD-C5.2 J1.15 J1.16 L5.2
EPD_BUSY/1.5D: J1.9
EPD_BUSY/2.2D: U1.P$AD12
EPD_CS/1.4C: J1.12
EPD_CS/2.2D: U1.P$K2
EPD_DC/1.5D: J1.11
EPD_DC/2.2D: U1.P$AD10
EPD_RST/1.5D: J1.10
EPD_RST/2.2D: U1.P$AC11
GDR: J1.2 Q3.1 R2_EP_DR.2
GND: C1-EP-DR.2 C1.2 C2.2 C3.2 C4.2 C5.2 C6.2 C7.2 C8.2 C9.2 C10.2 C11.2 C12.2 C13.2 C14.2 C15.2 C16.2 C17.1 C18.1 C19.2 C20.2 C21.2 C22.2 C23.1 C24.1 C25.2 C27.1 C29.1 C30.1 C31.1 C32.1 C33.2 C34.1 C37.1 C38.1 C39.2 C42.1 C43.2 D3.2 D4.1 EPD-C5.1 EPD_C1.1 EPD_C2.1 EPD_C6.1 EPD_C7.1 EPD_C8.1 EPD_C9.1 EPD_C10.1 EPD_C11.1 EPD_C12.1 IC1.D2 IC2.B1 IC2.B3 IC3.8 IC3.9 IC9.B1 IC9.C1 IC9.C2 IC9.C3 J1.8 J1.17 J1.MP1 J1.MP2 J2.3 J2.5 J4.A1_B12 J4.A12_B1 J4.SH1 J4.SH2 J4.SH3 J4.SH4 R1.1 R1_USB.1 R2_EP_DR.1 R2_USB.2 R3.1 R_TYPE_SEL.1 SJ1.1 SW_DN.1 SW_ENT.1 SW_UP.1 TP_BAT_GND.TP TP_GND.TP U1.P$74 U1.P$75 U1.P$76 U1.P$77 U1.P$78 U1.P$79 U1.P$80 U1.P$81 U1.P$82 U1.P$83 U1.P$84 U1.P$85 U1.P$86 U1.P$87 U1.P$88 U1.P$89 U1.P$90 U1.P$B7 U1.P$F23 U3.1 U3.4 U3.6 U3.9 X1.2 X1.4
HAPTIC_EN/1.4C: IC2.A1
HAPTIC_EN/2.6A: U1.P$U1
IMU_INT1: IC3.5 U1.P$N1
IMU_INT2: IC3.6 U1.P$P2
LX1: IC9.B2 IC9.B3 L7.1
LX2: IC9.D2 IC9.D3 L7.2
MOSI/1.5D: J1.14
MOSI/2.2D: U1.P$B13
N$1: IC9.D1 R4.2
N$2: IC3.1 R3.2
N$3: C9.1 U1.P$N24
N$4: IC9.E1 R2.2
N$5: C20.1 U1.P$AC5
N$6: C3.1 L1.1 U1.P$H23
N$7: ANT1.1 C4.1 C22.1 L1.2
N$8: C1.1 U1.P$B24 X1.1
N$9: C2.1 U1.P$A23 X1.3
N$10: C13.1 U1.P$A18
N$11: C11.1 U1.P$D23
N$12: C10.1 C15.1 C16.1 L3.2 U1.P$B5 U1.P$E24
N$13: L2.1 U1.P$B3
N$14: L2.2 L3.1
N$15: C5.1 U1.P$C1
N$16: C17.2 U1.P$D2 X2.1
N$17: C2-EP-DR.2 D5.2 L5.1 Q3.3
N$18: C18.2 U1.P$F2 X2.2
N$20: C2-EP-DR.1 D2.1 D4.2
N$22: R1_EP_DR.1 R_TYPE_SEL.2 SJ1.2
N$23: Q1.2
N$24: Q1.3
N$25: Q1.1 R_POWER_EPD.1
N$26: R_POWER_EPD.2
N$27: TP_OP.TP
N$28: TP_ON.TP
N$29: EPD_C1.2 J1.4
N$30: EPD_C2.2 J1.5
N$31: EPD_C6.2 J1.18
N$32: J4.B5 R2_USB.1
N$33: EPD_C7.2 J1.19
N$34: C32.2 IC2.A2
N$35: EPD_C8.2 J1.20
N$36: J4.A5 R1_USB.2
N$38: EPD_C10.2 J1.22
N$40: EPD_C12.2 J1.24
OUT+: IC2.A3
OUT-: IC2.C3
P0.04: U1.P$J1
P0.09: U1.P$L24
P0.13/1.5D: C30.2 R5.1 SW_UP.2
P0.13/2.6C: U1.P$AD8
P0.14/1.5D: C31.2 R8.1 SW_ENT.2
P0.14/2.7C: U1.P$AC9
P0.19: U1.P$AC15
P0.20: U1.P$AD16
P0.21: U1.P$AC17
P0.22: U1.P$AD18
P0.23: U1.P$AC19
P0.24: U1.P$AD20
P0.25: U1.P$AC21
P0.26: U1.P$G1
P0.27: U1.P$H2
P0.28: U1.P$B11
P0.29: U1.P$A10
P0.30: U1.P$B9
P0.31: U1.P$A8
P1.01/2.4B: U1.P$Y23
P1.02/1.6C: C29.2 R7.1 SW_DN.2
P1.02/2.8C: U1.P$W24
P1.03: U1.P$V23
P1.04: U1.P$U24
P1.05: U1.P$T23
P1.06: U1.P$R24
P1.07: U1.P$P23
P1.09: U1.P$R1
P1.10: U1.P$A20
P1.11: U1.P$B19
P1.12: U1.P$B17
P1.13: U1.P$A16
P1.14: U1.P$B15
P1.15: U1.P$A14
PMIC_INT: IC1.A1 U1.P$T2
PREVGH: D5.1 EPD_C9.2 J1.21
PREVGL: D2.2 EPD_C11.2 J1.23
RESE: J1.3 Q3.2 R1_EP_DR.2
RESET: J2.6 TP_RESET.TP U1.P$AC13
SCK/1.5D: J1.13
SCK/2.2D: U1.P$A12
SCL/1.4C: IC2.C1 U3.7
SCL/2.4C: IC1.B1 IC3.12 R4.1 R17.2 TP_SCL.TP U1.P$M2
SDA/1.4C: IC2.B2 U3.8
SDA/2C: IC1.C1 IC3.2 R2.1 R18.2 TP_SDA.TP U1.P$L1
SWDCLK: J2.4 TP_SWDCLK.TP U1.P$AA24
SWDIO: J2.2 TP_SWDIO.TP U1.P$AC24
SWO: TP_SWO.TP U1.P$AD22
VBAT/1.2A: C27.2 TP_VBAT.TP U3.2 U3.3
VBAT/2.5C: C37.2 IC1.C2
VBUS/1.5D: C42.2 C43.1 D3.5 J4.A4_B9 J4.A9_B4
VBUS/2.6D: C21.1 C38.2 IC1.A2 U1.P$AD2
VREG: C23.2 C24.2 C39.1 IC1.B2 IC9.A1 IC9.A2 IC9.A3 TP_VREG.TP

## Tracks (layer width: path | path; a pad name or v marks a point on that pad's centre or on a via)
3V3/1.7D  (via drill 0.35)
  Top 0.152: v16.92,18.55 16.42,19.05 C34.2 | v30.3,4.18 30.55,3.93 31.05,3.93 R7.2
  Top 0.305: IC2.C2 22.36,9.54 22.6,9.3 23.4,9.3 v23.7,9.6 | R8.2 20.31,5.39 v19.1,6.6 18.73,6.23 R5.2
  Route15 0.305: v19.1,6.6 20.7,6.6 v23.7,9.6
  Bottom 0.152: v16.93,18.55 16.93,17.64 24.39,10.17 | v16.93,18.55 16.93,18.71 | 24.39,10.17 30.34,4.23 v30.3,4.18 | 24.39,10.17 23.85,9.63 23.8,9.68 v23.7,9.6 | v16.92,18.55 v16.93,18.55
3V3/2.4A  (via drill 0.35)
  Top 0.152: 24.55,12.93 C19.1 | 24.17,11.3 C14.1 | 24.42,11.55 24.3,11.43 C14.1 | 23.67,15.8 R18.1 | C6.1 23.8,13.93 23.67,14.05 C6.1 | 21.67,13.18 21.8,13.05 TP_3V3.TP | 22.05,15.68 R17.1 | TP_3V3.TP 21.92,13.05 22.67,13.05 TP_3V3.TP | C19.1 24.42,13.05 23.8,13.68 C6.1 | 34.3,16.93 34.3,18.68 33.92,19.05 U1.P$AD23 | 33.42,16.05 34.3,16.93 | 33.42,16.05 33.42,15.55 C25.1 | 34.3,16.93 35.17,16.05 39.3,16.05 39.55,16.3 40.3,16.3 J2.1 | IC9.E2 32.05,12.93 32.42,12.93 IC9.E3 32.42,12.8 32.55,12.68 32.55,11.93 C8.1 32.42,11.93 32.05,12.3 31.8,12.3 v31.67,12.18 | U1.P$Y2 28.42,20.43 28.17,20.68 27.92,20.68 U1.P$W1 27.92,20.55 26.87,20.55 v26.8,20.48 | U1.P$AD14 31.42,19.05 31.42,18.9 30.55,18.03 v30.45,18.03 30.45,17.7 31.75,16.4 33.08,16.4 33.42,16.05 | 23.55,18.43 IC3.3 | C14.1 24.42,11.62 24.42,12.18 C7.1 24.55,12.3 24.55,12.94 C19.1 | v26.3,10.6 26.3,12.31 C33.1 | IC3.10
  Top 0.305: U1.P$B1 28.48,25.62 C12.1 28.08,26.39 v27.6,25.9 | TP_3.3V.TP 34.94,26.64 v34.7,26.4 34.1,26.4 33.44,25.74 U1.P$A22 | 22.67,13.05 22.95,13.05 C6.1 24.2,14.3 v24.2,15 24.2,15.36 R18.1 | IC3.3 23.11,18.44 22.86,18.2 v22.8,18.2 22.05,17.45 IC3.10 | R17.1 21.67,15.23 21.67,13.18 | v23.4,20.5 23.4,20.8 22.01,19.41 IC3.7
  Route15 0.305: v34.7,26.4 28.1,26.4 v27.6,25.9 27.6,21.28 | v24.2,15 24.2,16.8 v22.8,18.2 22.5,18.5 22.5,20.1 22.9,20.5 v23.4,20.5 | v24.2,15 24.2,14.8 26.2,12.8 26.2,10.7 v26.3,10.6 | v24.2,15 24.2,11.3 26.3,9.2 30.1,9.2 31.67,10.78 v31.67,12.18 32.27,12.78 32.27,16.2 v30.45,18.03 29.48,19 28.8,19 28.7,18.9 28.3,19.3 28.3,19.4 28.5,19.6 28.5,19.98 27.6,20.88 27.6,21.28 | v26.8,20.48 27.6,21.28
  Bottom 0.152: 22.72,18.25 22.72,18.18 22.8,18.18 v22.8,18.2 | 24.24,14.9 24.13,15.01 | 24.13,15.01 23.95,15.2 23.92,15.18 | 26.9,20.48 v26.8,20.48 | v24.2,15 24.35,15.23 24.13,15.01
10K
  Top 0.152: IC1.D1 27.92,14.05 27.55,14.05 27.38,13.88 R1.2
DN
  Top 0.152: D3.1 24.3,27.27 J4.B7 24.3,29.5 24,29.8 23.6,29.8 23.3,29.5 J4.A7
DP
  Top 0.152: J4.A6 23.8,28.05 22.75,28.05 | J4.B6 22.8,28.1 22.75,28.05 | 22.75,28.05 22.17,27.47 D3.3
EPD_3V3  (via drill 0.35)
  Top 0.152: 11.3,16.59 J1.15 | v15.92,15.8 EPD-C5.2 | v13.92,18.8 13.55,19.18 13.05,19.18 C1-EP-DR.1 | J1.15 10.83,16.55 v10.3,16.55 | v17.05,20.43 18.05,21.43 18.55,21.43 L5.2 | J1.15 J1.16
  Bottom 0.152: 15.1,17.64 16.32,18.86 16.32,19.01 17.33,20.02 | 15.1,17.64 14.65,17.2 | 14.65,17.2 13.58,16.12 10.42,16.12 | 17.33,20.02 19.37,22.06 19.67,22.06 | 15.1,17.64 13.93,18.81 | 13.93,18.81 13.88,18.86 | 10.42,16.12 10.22,16.12 | v15.92,15.8 14.67,17.05 14.67,17.18 14.65,17.2 | v13.92,18.8 13.93,18.81 | v10.3,16.55 10.42,16.43 10.42,16.12 | 17.33,20.02 17.05,20.3 v17.05,20.43
GDR
  Top 0.152: R2_EP_DR.2 19.55,27.55 13.3,27.55 12.92,27.18 12.42,27.18 Q3.1 12.3,27.18 10.42,25.3 10.42,23.16 J1.2
GND  (via drill 0.2, 0.3)
  Top 0.152: J2.5 42.92,16.43 41.8,16.43 J2.3 41.67,16.43 41.05,16.43 41.05,15.18 40.55,14.68 40.55,10.93 38.92,9.3 38.92,9.18 TP_GND.TP | 31.67,13.68 31.67,14.05 IC9.B1 31.58,14 C23.1 | 31.67,13.68 IC9.C2 | 31.67,13.68 IC9.C1 | U1.P$B7 29.67,25.05 30.55,24.18 U1.P$76 | U1.P$F23 33.92,23.93 33.17,23.93 33.05,24.05 U1.P$78 | C21.2 26.05,14.93 25.42,14.3 25.42,13.55 25.05,13.18 25.05,13.05 C19.2 24.99,12.23 C7.2 | IC9.C2 32.42,13.68 IC9.C3 | IC9.C2 | U3.4 23.67,8.55 23.3,8.55 23.05,8.8 22.8,8.8 22.17,8.18 21.8,8.18 U3.6 | J4.SH4 19.07,29.32 18.55,28.8 18.55,28.55 18.92,28.18 19.92,29.18 19.92,30.18 19.42,30.68 19.05,30.68 18.92,30.8 18.8,30.8 18.42,30.43 18.55,30.3 18.69,30.44 J4.A12_B1 20.25,27.67 R2_EP_DR.1 | J4.A1_B12 27.12,28.88 28.67,30.43 28.3,30.8 28.17,30.8 28.05,30.68 27.67,30.68 27.17,30.18 27.17,29.05 27.8,28.43 27.8,29.42 J4.SH3 | U1.P$84 30.67,21.8 31.17,22.3 U1.P$74 | 21.5,10.71 21.5,11.1 | 24.15,10.35 24.2,10.3 | C33.2 26.36,12.94 v26.9,12.4 | C1-EP-DR.2 13.3,20.5 EPD_C1.1 EPD_C2.1 | IC3.8 IC3.9 | C20.2 30.8,16.1 31.1,16.1 31.1,16 31.8,16 C39.2 32.9,14.9 32.9,14.4 | v25.5,16.4 25.11,16.01 C38.1
  Bottom 0.152: v12,8.4 14.3,6.1 v14.3,5.6
  other vias: 19.5,16 28.1,13.3 26.2,15.6 36.8,26.3 42.6,25.7 33.5,14.8 33.5,13.6 23,14.1
  pour Bottom: 2.13,-4.22 44.77,-4.22 51.62,2.63 51.62,33.57 47.27,37.92 -0.97,37.92 -5.42,33.47 -5.42,3.33
  pour Top: -1.62,-4.62 49.72,-4.62 49.72,39.02 -1.62,39.02
IMU_INT1  (via drill 0.2)
  Top 0.152: 23,19 IC3.5 24,19.94 24,22.4 25.1,23.5 v27,23.5 | 27.96,22.1 U1.P$N1 27.92,22.1 v27,22.1
  Bottom 0.152: v27,23.5 v27,22.1
IMU_INT2  (via drill 0.2)
  Top 0.152: U1.P$P2 27.63,21.83 27.2,21.4 v26.7,21.4 | IC3.6 22.53,19.13 v23.1,19.7
  Bottom 0.152: v23.1,19.7 24.8,19.7 25.9,18.6 27,19.7 27,19.9 27.5,20.4 27.5,20.6 v26.7,21.4
LX1
  Top 0.152: IC9.B2 32.05,14.05 32.42,14.05 IC9.B3 32.55,14.05 34.42,14.05 34.57,13.91 L7.1
LX2
  Top 0.152: IC9.D2 32.05,13.3 32.42,13.3 IC9.D3 32.55,13.3 32.8,13.3 34.3,11.8 34.94,11.8 L7.2
N$1  (via drill 0.2)
  Top 0.152: R4.2 v32.7,10.6 | IC9.D1 31.63,13.27 v31.6,13.3
  Bottom 0.152: v32.7,10.6 32.7,12.2 v31.6,13.3
N$2
  Top 0.152: R3.2 23.05,14.8 23.05,16.55 23.55,17.05 23.55,17.43 IC3.1
N$3
  Top 0.152: C9.1 35.28,21.24 U1.P$N24
N$4
  Top 0.152: IC9.E1 31.67,12.93 31.42,12.93 31.17,13.18 30.92,13.18 R2.2
N$5  (via drill 0.2, 0.35)
  Top 0.152: v30.05,17 29.67,16.62 29.67,15.93 C20.1 | U1.P$AC5 v29.2,19.6
  Bottom 0.152: v30.05,17 30.5,17 31.17,17.68 31.17,18.55 30.25,18.55 v29.2,19.6
N$6  (via drill 0.35)
  Top 0.152: v34.92,23.55 34.8,23.43 33.92,23.43 U1.P$H23 | 38.8,27.3 38.92,27.18 38.92,26.8 C3.1 | 38.8,27.3 39.3,27.8 39.92,27.8 L1.1 | 38.8,27.3 v38.55,27.55
  Bottom 0.152: v34.92,23.55 38.55,27.18 v38.55,27.55
N$7
  Top 0.152: 41.05,27.68 41.05,27.8 L1.2 | 41.05,27.68 41.05,27.55 41.17,27.43 41.17,26.8 C22.1 | 41.05,27.68 40.17,26.8 C4.1 | 41.05,27.68 L1.2 | ANT1.1 39.3,30.31 39.3,28.7 39.5,28.5 40.9,28.5 40.95,28.45 L1.2
N$8
  Top 0.152: U1.P$B24 34.42,25.18 35.55,25.18 36.55,24.18 36.55,24.1 | C1.1 36.92,22.93 36.55,23.3 36.55,24.1 | 36.55,24.1 37.47,24.1 X1.1
N$9
  Top 0.152: U1.P$A23 33.92,25.68 35.17,25.68 35.55,26.05 35.55,26.18 C2.1 35.55,26.3 35.55,26.55 36.05,27.05 36.8,27.05 37.61,26.56 X1.3
N$10
  Top 0.152: C13.1 32.46,25.58 U1.P$A18
N$11  (via drill 0.2 pad 0.1, 0.4 pad 0.1)
  Top 0.152: v34,24.9 34,24.39 U1.P$D23 | C11.1 35.68,22.58 v35.6,22.5
  Bottom 0.152: v34,24.9 34,23.4 34.9,22.5 v35.6,22.5
N$12  (via drill 0.35)
  Top 0.152: v34.92,24.55 34.8,24.55 34.42,24.18 U1.P$E24 | v33,30.2 33.05,30.15 33.05,28.62 | 33.05,28.62 33.05,27.8 32.67,27.43 32.42,27.43 32.35,27.5 32.25,27.5 | 33.05,28.62 C16.1 | 32.25,27.5 C15.1 31.4,27.2 30.36,26.16 30.42,26.05 L3.2 30.42,26.18 29.98,26.62 29.27,25.93 29.27,25.17 U1.P$B5 | C10.1 32.25,27.5
  Bottom 0.152: v34.92,24.55 33,26.48 v33,30.2
N$13
  Top 0.152: U1.P$B3 28.9,25.29 28.9,26 29.6,26.7 29.6,27.17 L2.1
N$14
  Top 0.152: L3.1 30.41,27.34 29.52,28.23 L2.2
N$15
  Top 0.152: U1.P$C1 27.92,24.68 27.8,24.68 27.48,25 26.71,25 C5.1
N$16
  Top 0.152: U1.P$D2 28.42,24.3 28.05,23.93 27.67,23.93 27.55,24.05 24.92,24.05 21.42,20.55 19.42,20.55 18.05,19.18 X2.1 17.92,19.05 17.92,18.3 18.8,17.43 C17.2
N$17  (via drill 0.35)
  Top 0.152: 19.8,9.3 19.92,9.43 20.42,9.43 20.8,9.8 C2-EP-DR.2 | 16.05,26.05 18.55,26.05 L5.1 16.05,26.05 | Q3.3 14.55,26.55 15.42,26.55 15.42,26.12 15.35,26.05 | v17.42,9.3 19.8,9.3 | v15.35,24.55 15.35,26.05 | 19.8,9.3 D5.2 | 15.35,26.05 16.05,26.05
  Bottom 0.152: v17.42,9.3 11.17,15.55 9.67,15.55 9.67,18.48 15.35,24.15 v15.35,24.55
N$18  (via drill 0.2)
  Top 0.152: C18.2 X2.2 20.96,19.16 v23.2,21.4 | U1.P$F2 28.44,23.74 28,23.3 27.5,23.3 27.2,23 25.6,23 v25.3,22.7
  Bottom 0.152: v25.3,22.7 24.5,22.7 v23.2,21.4
N$20
  Top 0.152: C2-EP-DR.1 20.8,10.8 19.8,10.8 D2.1 19.8,10.93 19.8,12.68 D4.2
N$22
  Top 0.152: R1_EP_DR.1 19.37,14.68 18.92,14.68 18.55,14.3 SJ1.2 18.55,14.18 20.05,14.18 20.55,14.68 R_TYPE_SEL.2
N$25  (via drill 0.35)
  Top 0.152: v15.17,19.43 16.42,18.18 16.42,17.43 R_POWER_EPD.1 | v13.42,17.93 13.05,18.3 12.42,18.3 Q1.1
  Bottom 0.152: v15.17,19.43 13.3,19.43 13.3,18.05 v13.42,17.93
N$29  (via drill 0.35)
  Top 0.152: v13.3,23.05 12.8,22.55 12.8,21.68 12.3,21.18 EPD_C1.2 | J1.4 10.65,22.08 v10.3,22.43
  Bottom 0.152: v13.3,23.05 12.67,22.43 v10.3,22.43
N$30
  Top 0.152: EPD_C2.2 12.3,22.05 12.17,22.05 11.58,21.45 J1.5
N$31
  Top 0.152: EPD_C6.2 12.67,14.93 11.6,14.93 J1.18
N$32  (via drill 0.35)
  Top 0.152: v22.3,31.93 21.8,32.43 R2_USB.1 | v21.37,27.68 21.7,28 J4.B5
  Bottom 0.152: v22.3,31.93 21.37,31 v21.37,27.68
N$33
  Top 0.152: EPD_C7.2 12.42,14.18 11.92,14.18 11.51,14.59 J1.19
N$34
  Top 0.152: C32.2 23.42,11.68 23.42,11.55 23.17,11.3 22.8,11.3 22.42,10.93 IC2.A2
N$35
  Top 0.152: EPD_C8.2 12.55,13.18 12.42,13.18 11.51,14.09 J1.20
N$36  (via drill 0.35)
  Top 0.152: v24.55,31.93 25.05,32.43 R1_USB.2 | J4.A5 24.7,28.15 v25.17,27.68
  Bottom 0.152: v24.55,31.93 25.17,31.3 v25.17,27.68
N$38
  Top 0.152: J1.22 10.71,12.99 10.7,13 10.5,12.8 10.5,10 EPD_C10.2
N$40
  Top 0.152: EPD_C12.2 12.8,11.05 12.05,11.05 11.44,11.66 J1.24
P0.13/1.5D
  Top 0.152: 11.7,6.45 10.55,5.3 10.55,4.18 SW_UP.2 | 11.7,6.45 12.05,6.8 15.3,6.8 R5.1 | C30.2 11.7,6.45
P0.14/1.5D
  Top 0.152: 22.17,5.05 22.3,5.05 23.05,5.8 C31.2 | 22.17,5.05 21.92,4.8 21.92,4.05 SW_ENT.2 | 22.17,5.05 21.17,6.05 20.8,6.05 R8.1
P1.02/1.6C
  Top 0.152: 33.17,4.55 33.17,4.18 SW_DN.2 33.17,4.55 | 33.17,4.55 33.17,5.43 34.05,6.3 C29.2 | 33.17,4.55 31.17,4.55 R7.1
PMIC_INT  (via drill 0.2, 0.2 pad 0.1)
  Top 0.152: U1.P$T2 v28.41,21.3 v28.4,21.3 | IC1.A1 28.01,15.39 v27.6,15.8
  Bottom 0.152: v28.4,21.3 28.3,21.2 28.3,16.5 v27.6,15.8
PREVGH
  Top 0.152: D5.1 16.3,8.12 15.58,7.4 10.08,7.4 8.17,9.3 8.17,9.8 EPD_C9.2 8.3,9.8 9.92,11.43 9.92,12.55 9.9,12.58 9.9,13.3 10.09,13.49 J1.21
PREVGL
  Top 0.152: 12.8,12.18 11.92,12.18 11.58,12.52 11.5,12.49 J1.23 | 12.8,12.18 13.42,11.55 14.17,11.55 14.8,10.93 16.17,10.93 D2.2 | 12.8,12.18 EPD_C11.2
RESE
  Top 0.152: R1_EP_DR.2 19.42,15.3 18.05,15.3 17.05,16.3 16.3,16.3 15.42,17.18 15.42,18.3 14.05,19.68 14.05,24.05 12.3,25.8 Q3.2 12.39,23.26 11.55,22.49 J1.3
RESET  (via drill 0.2 pad 0.1, 0.25 pad 0.1)
  Top 0.152: U1.P$AC13 v31.19,19.51 v31.2,19.5 | J2.6 43.36,17.64 v44,17 | TP_RESET.TP 28.64,16.06 v28.8,15.9
  Bottom 0.152: v31.2,19.5 33.7,17 34.4,17 | 34.4,17 34.4,11.4 32.7,9.7 31.7,9.7 31.7,11 31.5,11 31.1,11.4 31.1,12.1 28.8,14.4 v28.8,15.9 | 34.4,17 37.7,17 38.6,16.1 39.7,16.1 40.2,16.6 40.2,16.9 40.3,17 v44,17
SCL/1.4C
  Top 0.152: IC2.C1 21.8,9.8 21.67,9.68 21.67,9.43 20.8,8.55 20.8,8.18 21.3,7.68 21.67,7.68 U3.7
SCL/2.4C  (via drill 0.2, 0.35)
  Top 0.152: 22.17,16.68 22.17,16.3 R17.2 | 22.17,16.68 22.3,16.8 22.67,16.8 23.05,17.18 23.05,17.3 IC3.12 | v27,15.2 27.27,15.2 27.67,14.8 27.92,14.8 IC1.B1 | v26.92,16.93 26.42,17.43 26.42,18.3 TP_SCL.TP 26.34,19.46 v26,19.8 | v30.67,10.95 30.9,11.18 R4.1 | 22.17,16.68 22.05,16.8 v21.52,16.28 | U1.P$M2 v28.5,22.4
  Bottom 0.152: v26.92,16.93 26.92,15.28 v27,15.2 30.42,11.78 30.42,11.2 | v21.52,16.28 21.3,16.05 21.3,14.1 26.92,8.48 30.42,8.48 30.42,11.2 | 30.42,11.2 v30.67,10.95 | v28.5,22.4 28.5,27.1 28.4,27.2 27,27.2 26.1,26.3 26.1,19.9 v26,19.8
SDA/1.4C  (via drill 0.2)
  Top 0.152: IC2.B2 v22.35,10.36 | v21.8,6.4 21.7,6.5 U3.8
  Bottom 0.152: v22.35,10.36 22.35,6.95 v21.8,6.4
SDA/2C  (via drill 0.3, 0.35)
  Top 0.152: 25.27,21.23 25.27,21.13 TP_SDA.TP | R18.2 23.67,16.55 24.3,17.18 24.3,18.18 24.24,18.24 | IC1.C1 27.92,14.43 27.3,14.43 27.05,14.68 26.8,14.68 v26.05,13.93 28.42,11.55 30.05,11.55 30.8,12.3 30.8,12.55 R2.1 | v24.3,18.43 24.36,18.36
  Top 0.305: U1.P$L1 26.62,22.58 25.27,21.23 | IC3.2 23.94,17.94 24.24,18.24 24.36,18.36 25.24,19.24 TP_SDA.TP
  Bottom 0.152: 26.05,14.29 23.94,14.29 23.18,15.05 22.11,15.05 22.11,16.4 23.6,16.4 24.3,17.1 v24.3,18.43 24.3,18.4 | 26.05,14.29 v26.05,13.93 | 26.05,14.3 26.05,14.29
SWDCLK
  Top 0.152: 40.67,21.93 41.17,21.93 42.42,23.18 43.17,23.18 TP_SWDCLK.TP | 40.67,21.93 39.3,21.93 37.42,20.05 34.42,20.05 U1.P$AA24 | 40.67,21.93 40.67,18.68 41.67,17.68 J2.4
SWDIO  (via drill 0.35)
  Top 0.152: 35,18.98 36.05,17.93 39.8,17.93 40.05,17.68 40.3,17.68 J2.2 | 35,18.98 34.42,19.55 U1.P$AC24 | v36.8,20.68 39.42,23.3 40.88,23.3 TP_SWDIO.TP | 35,18.98 v35.48,19.45
  Bottom 0.152: v36.8,20.68 36.7,20.68 v35.48,19.45
SWO
  Top 0.152: U1.P$AD22 33.42,19.05 33.42,18.8 32.74,18.12 TP_SWO.TP
VBAT/1.2A
  Top 0.152: U3.2 U3.3
  Top 0.305: U3.2 24.77,7.59 C27.2 24.93,6.77 TP_VBAT.TP
VBAT/2.5C
  Top 0.152: IC1.C2 29.2,14.41 C37.2
VBUS/1.5D
  Top 0.305: D3.5 23.12,25.12 23.6,25.6 25.9,25.6 26.26,25.96 C42.2 26.26,27.45 C43.1 25.95,27.75 J4.A4_B9 25.95,29.55 24.8,30.7 22.4,30.7 21.15,29.45 J4.A9_B4 21.15,28.9 21.27,29.02
VBUS/2.6D  (via drill 0.3, 0.35)
  Top 0.152: 25.17,14.93 C21.1 | U1.P$AD2 28.44,19.11 | 25.42,17.28 25.42,17.18 25.42,17.15
  Top 0.305: 26.37,16.33 27.6,16.33 28.41,15.52 IC1.A2 | 25.17,14.93 25.17,15.33 25.98,16.12 26.58,16.12 26.37,16.33 | 26.37,16.33 25.42,17.28 | 25.42,17.18 v24.92,17.68 | 25.42,17.15 24.78,16.51 C38.2 | U1.P$AD2 27.72,19.8 v27.65,19.8
  Route15 0.305: v27.65,19.8 25.52,17.68 v24.92,17.68
VREG  (via drill 0.35)
  Top 0.152: 32.42,14.43 IC9.A3 | 32.05,14.43 IC9.A2 31.9,14.47 IC9.A1 | 31.3,15.33 C39.1
  Top 0.305: 28.76,9.94 TP_VREG.TP 28.96,9.94 v27.4,11.5 | v30,14.8 30.8,14.8 C39.1 31.4,14.47 | v30,14.8 IC1.B2 | v30,14.8 30.1,14.7 30.1,13 C24.2 | IC9.A1 31.4,14.47 | 31.4,14.47 30.89,14.47 C23.2 | IC9.A3 31.9,14.47
  Route15 0.305: v27.4,11.5 30,14.1 v30,14.8
(copper drawn outside any net)
  shapes: Bottom area x1, Top area x1